# Altium PCB StEth32_Base_XLR_Output.PcbDoc
Units mil, origin at the board's own origin, x right, y up, seen from the top; angles counter-clockwise.
Board outline 3622.05 x 984.25 mil, 2 copper layers (Top Layer, Bottom Layer), stack 62.17 mil thick; 19 components, 20 nets, 83 pads, 14 vias.
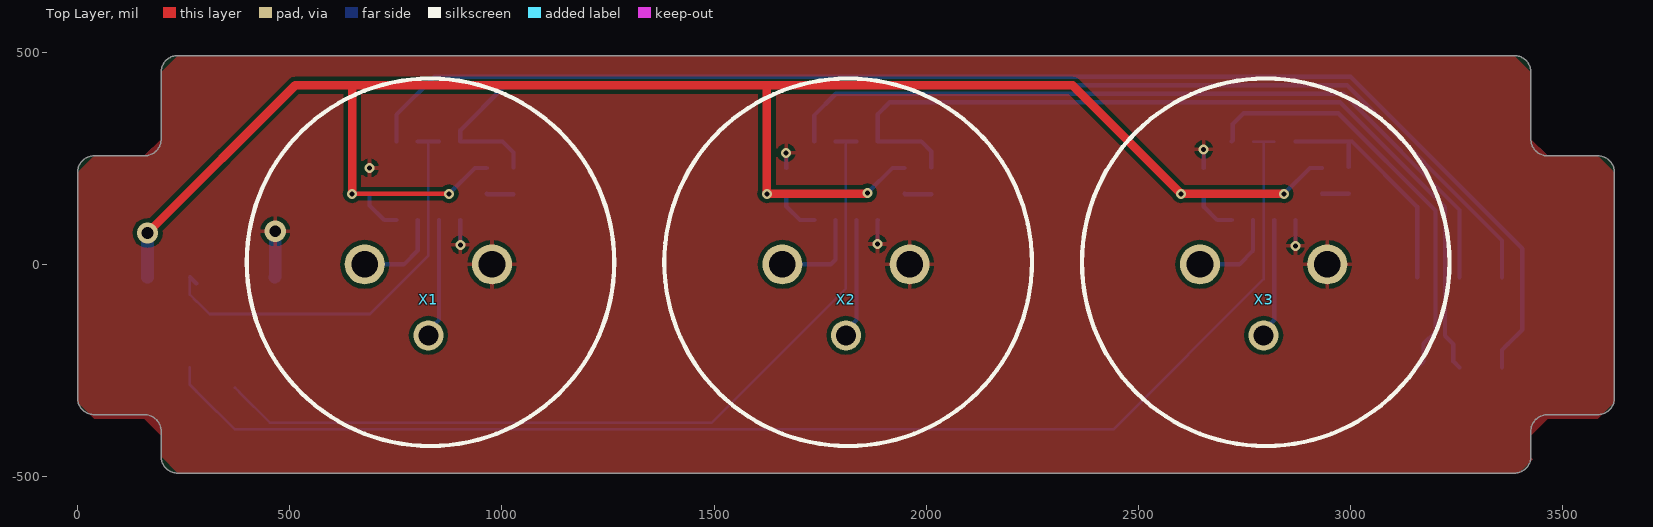
[diagram p0: Top Layer view]
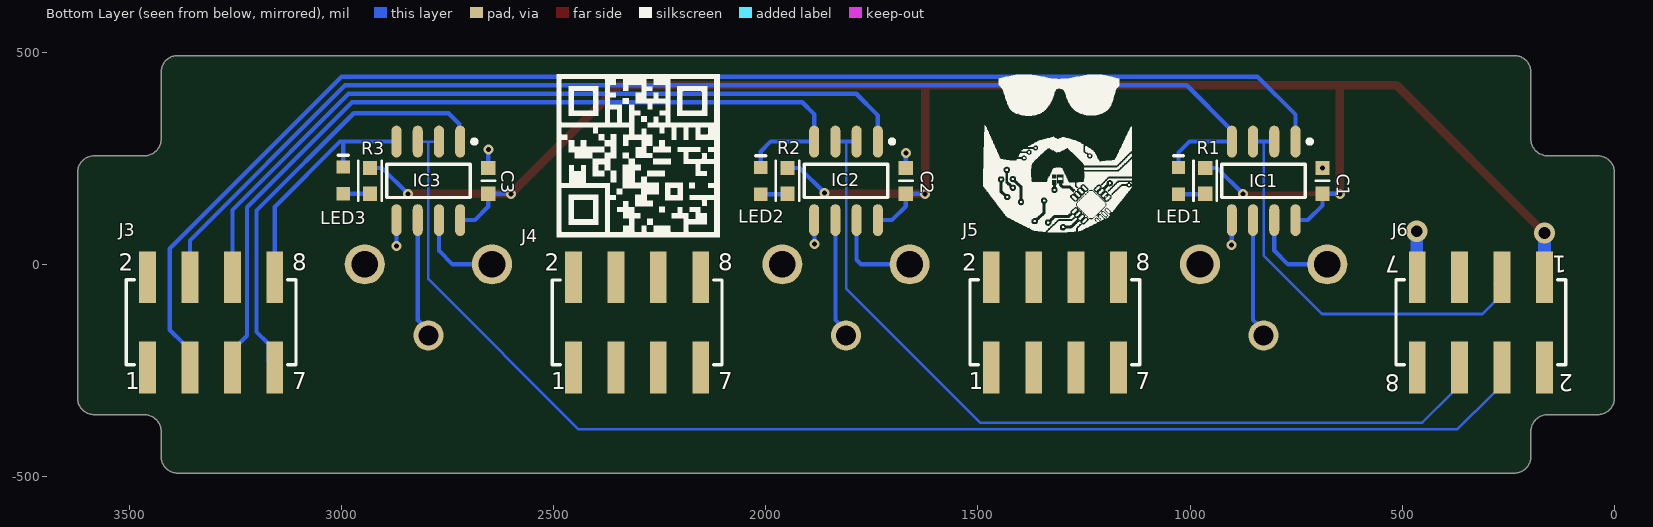
[diagram p1: Bottom Layer view, seen from below]
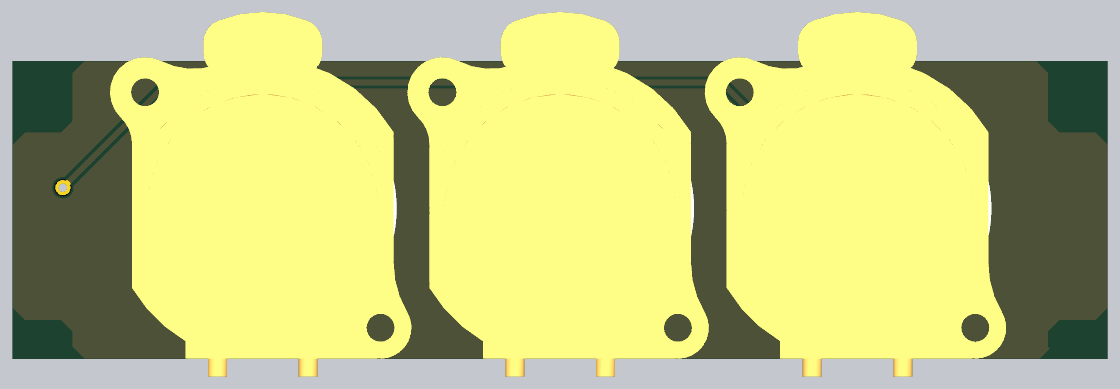
[diagram p2: 3D render of the assembled board from above, using the file's embedded part models]
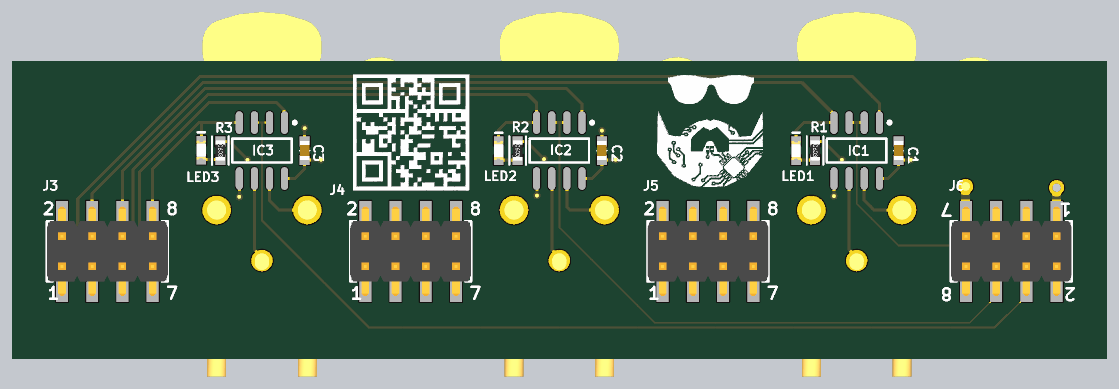
[diagram p3: 3D render of the assembled board from below, using the file's embedded part models]

## Layer stack, top to bottom
Top Solder: solder mask 0.4, Solder Resist, Dk 3.5
Top Layer: signal copper 1.4
Dielectric 1: dielectric 59.3701, FR-4, Dk 4.8
Bottom Layer: signal copper 1.4
Bottom Solder: solder mask 0.4, Solder Resist, Dk 3.5

## Board outline
39.37,-354.33 157.48,-354.33 cw(c157.48,-393.7) 196.85,-393.7 196.85,-452.76 ccw(c236.22,-452.76) 236.22,-492.13 3385.83,-492.13 ccw(c3385.83,-452.76) 3425.2,-452.76 3425.2,-393.7 cw(c3464.57,-393.7) 3464.57,-354.33 3582.68,-354.33 ccw(c3582.68,-314.96) 3622.05,-314.96 3622.05,216.54 ccw(c3582.68,216.54) 3582.68,255.91 3464.57,255.91 cw(c3464.57,295.28) 3425.2,295.28 3425.2,452.76 ccw(c3385.83,452.76) 3385.83,492.13 236.22,492.13 ccw(c236.22,452.76) 196.85,452.76 196.85,295.28 cw(c157.48,295.28) 157.48,255.91 39.37,255.91 ccw(c39.37,216.54) 0,216.54 0,-314.96 ccw(c39.37,-314.96)

## Design rules (kind name [scope] priority, off if disabled: settings)
Clearance [All] p1: gap=10 ignorepadtopadclearanceinfootprint=FALSE except(0: Arc-Hole Track-Hole SMDPad-Hole THPad-Hole Via-Hole Fill-Hole Poly-Hole Region-Hole Text-Hole)
PolygonConnect [All] p1: connectstyle=Relief reliefconductorwidth=10 reliefentries=4 polygonreliefangle="90 Angle" airgapwidth=10
RoutingVias [All] p1: holewidth=28 width=50 viastyle="Through Hole" minholewidth=28 minwidth=50 maxholewidth=28 maxwidth=50
SolderMaskExpansion [All] p1: expansion=4
Width [All] p1: maxlimit=60 minlimit=6 preferedwidth=10 minimp=50.000000 maximp=50.000000 favimp=50.000000
30 further rules are at their usual default settings.

## Components (designator, comment, footprint, x,y, rotation, side; value= is the part's Value field where it differs from the comment)
C1 "0.10µF" SMD-0603C 688,196.85 r0 bottom
C2 "0.10µF" SMD-0603C 1670,196.85 r0 bottom
C3 "0.10µF" SMD-0603C 2654,196.85 r0 bottom
IC1 "MAX485" D008_L 826.77,196.85 r270 bottom
IC2 "MAX485" D008_L 1811.02,196.85 r270 bottom
IC3 "MAX485" D008_L 2795.28,196.85 r270 bottom
J3 "2.54 mm_SMD_Vertical_8 pin" 61030821121 3307.09,-136.61 r180 bottom locked
J4 "2.54 mm_SMD_Vertical_8 pin" 61030821121 2303.15,-136.69 r180 bottom locked
J5 "2.54 mm_SMD_Vertical_8 pin" 61030821121 1318.9,-136.61 r180 bottom locked
J6 "2.54 mm_SMD_Vertical_8 pin" 61030821121 314.96,-136.61 r0 bottom locked
LED1 "150060SS75000" 0603_A 1027.56,196.85 r270 bottom
LED2 "150060SS75000" 0603_A 2011.81,196.85 r270 bottom
LED3 "150060SS75000" 0603_A 2996.06,198 r270 bottom
R1 "1k" SMD-0603-RES 964.57,196.85 r0 bottom
R2 "1k" SMD-0603-RES 1948.82,196.85 r0 bottom
R3 "1k" SMD-0603-RES 2933.07,196.85 r0 bottom
X1 "Conector" NC3FAAV1 826.77,0 r0 top locked
X2 "Conector" NC3FAAV1 1811.02,0 r0 top locked
X3 "Conector" NC3FAAV1 2795.28,0 r0 top locked

## Footprints (in the part's own frame and the unit in brackets; to place one, negate y for a bottom-side part, rotate by r counter-clockwise, add the part's x,y. Pads: shape width x height; smd on the part's side, far side on the other; paste and mask are expansions set on the pad)
0603_A [mm] "Chip LED, 2-Leads, Body 1.6x0.8mm, IPC Medium Density"
  rect 0.8x0.8 smd: 1(-0.8,0) 2(0.8,0)
  silkscreen extent -1.5,-0.3 -1.5,0.3, body extent -0.8,-0.4 0.8,0.4, height 0.7
61030821121 [mm] "Pin Header, pitch 2.54 mm, SMD, Vertical, dual row, 8p"
  rect 1x3.1 smd: 1(-3.81,-2.7) 2(-3.81,2.7) 3(-1.27,-2.7) 4(-1.27,2.7) 5(1.27,-2.7) 6(1.27,2.7) 7(3.81,-2.7) 8(3.81,2.7)
  silkscreen extent -5.08,-2.54 5.08,2.54, body extent -5.08,-3.75 5.08,3.75, height 9.62
D008_L [mm] "8-Pin Small Outline Integrated Circuit 1.27 mm Pitch, IPC High Density"
  oval 1.9x0.6 smd: 1(-2.35,1.905) 2(-2.35,0.635) 3(-2.35,-0.635) 4(-2.35,-1.905) 5(2.35,-1.905) 6(2.35,-0.635) 7(2.35,0.635) 8(2.35,1.905)
  silkscreen extent -2.47,-2.5 1,2.88, body extent -1.95,-2.45 1.95,2.45, height 1.75
NC3FAAV1 [mm] "Neutrik XLR"
  round 2.4 hole 1.6: 1(3.81,0) 2(-3.81,0)
  round 1.8 hole 1.2: 3(0,-4.25)
  silkscreen extent -10.87,-10.87 11.13,11.13, body extent -12.85,-14 12.5,16.65, height 30.9
SMD-0603-RES [mm]
  rect 0.85x0.85 smd: 1(0,0.775) 2(0,-0.775)
  silkscreen extent -0.7,-1.2 0.7,1.2, body extent -0.4,-0.85 0.4,0.85, height 0.56
SMD-0603C [mm]
  rect 0.85x0.85 smd: 1(0,0.775) 2(0,-0.775)
  silkscreen extent -0.4,0 0.4,0, body extent -0.4,-0.8 0.4,0.8, height 0.9

## Part data
C1 C2 C3: library part GCM188R71C104KA37J, "CAP CER 0.1UF 16V X7R 0603", Digi-Key Part Number=490-8015-1-ND, Manufacturer="Murata Electronics North America", Operating Temperature="-55°C ~ 125°C", Package / Case="0603 (1608 Metric)", Ratings=AEC-Q200, Temperature Coefficient=X7R, Tolerance=±10%, Voltage=16V, @ qty=0, Applications=Automotive, Datasheets=http://www.murata.com/~/media/webrenewal/support/library/catalog/products/capacitor/mlcc/c03e.ashx, Factory Stock=0, Features=-, Height - Seated (Max)=-, Image=//media.digikey.com/Renders/Murata%20Renders/0603%28GCM188%29.jpg, Lead Spacing=-, Lead Style=-, Minimum Quantity=1, Mounting Type="Surface Mount, MLCC", Packaging="Cut Tape (CT)", Part Number=GCM188R71C104KA37J, Part Status=Active, Quantity Available=17844, Series=GCM, Size / Dimension="0.063\" L x 0.031\" W (1.60mm x 0.80mm)", Thickness (Max)="0.035\" (0.90mm)", Unit Price (USD)=0.18
J3 J4 J5 J6: library part 61030821121, "Pin Header WR-PHD, pitch 2.54 mm, SMD, Vertical, dual row, 8 pin", Contact Resistance="20 mOhm", Insulation Resistance=">1000 MOhm", Operating Temperature="-40 to 125 degC", Rated Current="3 A", Working Voltage="250 VAC", ComponentLink1Description=Manufacturer, ComponentLink1URL=http://www.we-online.de, ComponentLink2Description=Datasheet, ComponentLink2URL=http://katalog.we-online.de/em/datasheet/6103xx21121.pdf, Mounting Technology=SMD, Orientation=Vertical, Part Number=61030821121, Pin Number=8, Pitch="2.54 mm", Published Date="Jan. 2018", Publisher="Wurth Elektronik", Row Number=Dual
LED1 LED2 LED3: "SMD mono-color Chip LED, WL-SMCW, Super Red", Color="Super Red", ComponentLink1Description="Manufacturer URL", ComponentLink1URL=http://www.we-online.com, ComponentLink2Description=Datasheet, ComponentLink2URL=http://katalog.we-online.com/led/datasheet/150060SS75000.pdf, PackageReference=0603_A, PartNumber=150060SS75000
R1 R2 R3: library part ERJ-PA3F1001V, "RES SMD 1K OHM 1% 1/4W 0603", Digi-Key Part Number=P1.0KBYCT-ND, Manufacturer="Panasonic Electronic Components", Operating Temperature="-55°C ~ 155°C", Package / Case="0603 (1608 Metric)", Power (Watts)="0.25W, 1/4W", Supplier Device Package=0603, Temperature Coefficient=±100ppm/°C, Tolerance=±1%, @ qty=1500, Composition="Thick Film", Datasheets=https://industrial.panasonic.com/cdbs/www-data/pdf/RDA0000/AOA0000C243.pdf, Factory Stock=0, Failure Rate=-, Features="Automotive AEC-Q200, Pulse Withstanding", Height - Seated (Max)="0.022\" (0.55mm)", Image=//media.digikey.com/Photos/Panasonic%20Photos/MFG_ERJ-P6W%20Series.jpg, Minimum Quantity=1, Number of Terminations=2, Packaging="Cut Tape (CT)", Part Number=ERJ-PA3F1001V, Part Status=Active, Quantity Available=69166, Series=ERJ, Size / Dimension="0.063\" L x 0.031\" W (1.60mm x 0.80mm)", Unit Price (USD)=0.02372
X1 X2 X3: library part NC3FAAV1, "Neutrik XLR Connector"

## Via types
v1: diameter 23.62, hole 11.81, Top Layer to Bottom Layer, tented both sides, 12 vias
v2: diameter 50, hole 28, Top Layer to Bottom Layer, 2 vias

## Nets (pads, with @x,y where several pads share a name; then routed paths per layer and width w, separated by ;. In a path a pad name is that pad's centre, name@x,y a point inside that pad or via, vN(x,y) a via of type N, cw(c..) or ccw(c..) an arc to the next point about the centre after c; other vN are vias at no path point)
3,3V: C1.1 C2.1 C3.1 IC1.8 IC2.8 IC3.8 J6.1 R1.2 R2.2 R3.2 | length 4816.4
  Top Layer w10: v1(647.34,166.34) v1(875.66,166.34)
  Top Layer w20: v2(165,73.92) 513.08,422 649,422 ; v1(647.34,166.34) 647.34,420.34 649,422 ; v1(1861.67,168.67) 1860.69,168.67 1858.36,166.34 v1(1624.66,166.34) 1624.66,422 ; v1(2600,166.34) v1@2600.66,166.34 ; v1(2843.34,166.34) v1@2600.66,166.34 ; 649,422 1624.66,422 ; 1624.66,422 2345,422 v1@2600.66,166.34
  Bottom Layer w10: v2@164.96,73.88 v2(165,73.92) ; v1(647.34,166.34) C1.1 688,139 722.67,104.33 IC1.8 ; v1(875.66,166.34) 936.68,227.36 R1.2 ; v1(1624.66,166.34) C2.1 1670,137 1702.67,104.33 IC2.8 ; v1(1861.67,168.67) 1920.36,227.36 R2.2 ; v1(2600,166.34) C3.1 2654,136 2685.67,104.33 IC3.8 ; v1(2843.34,166.34) 2904.36,227.36 R3.2
  Bottom Layer w30: J6.1 v2@164.96,73.88
GND: C1.2 C2.2 C3.2 IC1.5 IC2.5 IC3.5 J6.7 X1.1 X2.1 X3.1 | length 363.8
  Bottom Layer w10: IC1.5 902,104.1 v1(902,46) ; C2.2 v1(1670,263) ; v1(1885,48) 1885,103.31 IC2.5 ; C3.2 v1(2654,271) ; v1(2870.28,43.72) IC3.5
  Bottom Layer w30: J6.7 466,-29.28 v2(466,78)
  other v1: 688,227.36
NetIC1_1: IC1.1 J3.3 | length 3221.2
  Bottom Layer w10: IC1.1 751.77,352.77 841,442 2999.85,442 3405,36.85 3405,-154 3372.11,-186.89 3371.77,-186.89 3357.09,-201.57 J3.3
NetIC1_2: IC1.2 IC1.3 J6.3 | length 1018.4
  Bottom Layer w6: J6.3 264.96,-71.65 281.65,-88.34 282.34,-88.34 311,-117 689,-117 826.77,20.77 826.77,289.37
  Bottom Layer w10: J6.3 J6.3@279.65,-45 ; IC1.2 826.77,289.37 IC1.3
NetIC1_4: IC1.4 J3.4 LED1.1 | length 2935.5
  Bottom Layer w10: LED1.1 1027.56,263.44 1001.63,289.37 IC1.4 901.77,315.77 1008,422 2991.57,422 3357.09,56.48 J3.4
NetIC1_6: IC1.6 X1.3 | length 282
  Bottom Layer w10: X1.3 826.77,-156.03 851.77,-131.03 IC1.6
NetIC1_7: IC1.7 X1.2 | length 210.1
  Bottom Layer w10: X1.2 769,0 801.77,32.77 IC1.7
NetIC2_1: IC2.1 J3.6 | length 1875.8
  Bottom Layer w10: IC2.1 1736.02,351.02 1787,402 2983.28,402 3257.09,128.2 J3.6
NetIC2_2: IC2.2 IC2.3 J6.6 | length 2001.4
  Bottom Layer w6: J6.6@371,-291 371.71,-291 381.65,-300.94 381.65,-301.65 453,-373 1495,-373 1810.83,-57.17 1810.83,289.37
  Bottom Layer w10: IC2.2 1810.83,289.37 ; 1811.02,289.37 IC2.3
NetIC2_4: IC2.4 J3.5 LED2.1 | length 2080.2
  Bottom Layer w10: LED2.1 2011.81,266.19 1988.63,289.37 IC2.4 1886.02,354.02 1914,382 2975,382 3222.4,134.6 3222.4,-168.4 3242.4,-188.4 3242.4,-228.23 J3.5
NetIC2_6: IC2.6 X2.3 | length 282
  Bottom Layer w10: X2.3 1811.02,-156.03 1836.02,-131.03 IC2.6
NetIC2_7: IC2.7 X2.2 | length 222.9
  Bottom Layer w10: X2.2 1775,0 1786.02,11.02 IC2.7
NetIC3_1: IC3.1 J3.7 | length 1012.7
  Bottom Layer w10: IC3.1 2722.58,291.67 2722.58,330.58 2748,356 2971,356 3200,127 3200,-159 3171.77,-187.23 3171.77,-228.23 J3.7
NetIC3_2: IC3.2 IC3.3 J6.4 | length 3158.5
  Bottom Layer w6: J6.4 J6.4@264.96,-282.96 ; J6.4@280.94,-298.94 J6.4@264.96,-282.96 ; IC3.2 2795.28,289.37 ; IC3.3 2795.28,289.37 ; J6.4@264.96,-282.96 264.96,-284.25 280.29,-299.58 327.69,-346.98 328.98,-346.98 371,-389 2441,-389 2795.28,-34.72 2795.28,289.37
NetIC3_4: IC3.4 J3.8 LED3.1 | length 576.9
  Bottom Layer w10: IC3.4 2995,289.37 ; LED3.1 2996.06,288.31 2995,289.37 ; J3.8 3157.09,135.91 3003.63,289.37 2995,289.37
NetIC3_6: IC3.6 X3.3 | length 282
  Bottom Layer w10: X3.3 2795.28,-156.03 2820.28,-131.03 IC3.6
NetIC3_7: IC3.7 X3.2 | length 210.4
  Bottom Layer w10: X3.2 2738,0 2770.28,32.28 IC3.7
NetLED1_2: LED1.2 R1.1 | length 63.4
  Bottom Layer w10: R1.1 965.55,165.35 LED1.2
NetLED2_2: LED2.2 R2.1 | length 63.4
  Bottom Layer w10: R2.1 1949.8,165.35 LED2.2
NetLED3_2: LED3.2 R3.1 | length 63.1
  Bottom Layer w10: R3.1 2933.24,166.5 LED3.2
pads on no net: J3.1 J3.2 J4.1 J4.2 J4.3 J4.4 J4.5 J4.6 J4.7 J4.8 J5.1 J5.2 J5.3 J5.4 J5.5 J5.6 J5.7 J5.8 J6.2 J6.5 J6.8

## Polygon pours and split planes (outlines as drawn)
GND on Top Layer "Top - GND" (solid, pour order 3): 3385.83,492.13 236.22,492.13 196.85,452.76 196.85,295.28 157.48,255.91 39.37,255.91 0,216.54 0,-324.8 39.37,-364.17 157.48,-364.17 196.85,-403.54 196.85,-452.76 236.22,-492.13 3396.87,-492.13 3430,-459 3425.2,-454.2 3425.2,-403.54 3464.57,-364.17 3582.68,-364.17 3622.05,-324.8 3622.05,216.54 3582.68,255.91 3464.57,255.91 3425.2,295.28 3425.2,452.76

## Silkscreen, mask and mechanical layers (free items; w line width, h text height)
Bottom Overlay:
  drawing of 65 lines, arcs and shapes, not listed
  text "String" at 4345,385 h60
  text "String" at 4261,362 h60
Mechanical 1:
  lines w39.37: 0,-324.8 ccw(c39.37,-324.8) 39.37,-364.17 157.48,-364.17 cw(c157.48,-403.54) 196.85,-403.54 196.85,-452.76 ccw(c236.22,-452.76) 236.22,-492.13 3385.83,-492.13 ccw(c3385.83,-452.76) 3425.2,-452.76 3425.2,-403.54 cw(c3464.57,-403.54) 3464.57,-364.17 3582.68,-364.17 ccw(c3582.68,-324.8) 3622.05,-324.8 3622.05,216.54 ccw(c3582.68,216.54) 3582.68,255.91 3464.57,255.91 cw(c3464.57,295.28) 3425.2,295.28 3425.2,452.76 ccw(c3385.83,452.76) 3385.83,492.13 236.22,492.13 ccw(c236.22,452.76) 196.85,452.76 196.85,295.28 cw(c157.48,295.28) 157.48,255.91 39.37,255.91 ccw(c39.37,216.54) 0,216.54 0,-324.8

## Text inside footprints (layer, text, board x,y; h text height)
J3: Bottom Overlay "2" at 3525.2,-14.57 h39.37; Bottom Overlay "1" at 3509.45,-294.09 h39.37; Bottom Overlay "7" at 3116.54,-294.09 h39.37; Bottom Overlay "8" at 3116.54,-14.57 h39.37
J4: Bottom Overlay "2" at 2521.26,-14.65 h39.37; Bottom Overlay "1" at 2505.51,-294.17 h39.37; Bottom Overlay "7" at 2112.6,-294.17 h39.37; Bottom Overlay "8" at 2112.6,-14.65 h39.37
J5: Bottom Overlay "2" at 1537.01,-14.57 h39.37; Bottom Overlay "1" at 1521.26,-294.09 h39.37; Bottom Overlay "7" at 1128.35,-294.09 h39.37; Bottom Overlay "8" at 1128.35,-14.57 h39.37
J6: Bottom Overlay "2" at 96.85,-258.66 h39.37 r180; Bottom Overlay "1" at 112.6,20.87 h39.37 r180; Bottom Overlay "7" at 505.51,20.87 h39.37 r180; Bottom Overlay "8" at 505.51,-258.66 h39.37 r180